# EAGLE board MCU board ATmega328p v3.0 (SN) RevB (EAGLE 9.2.1)
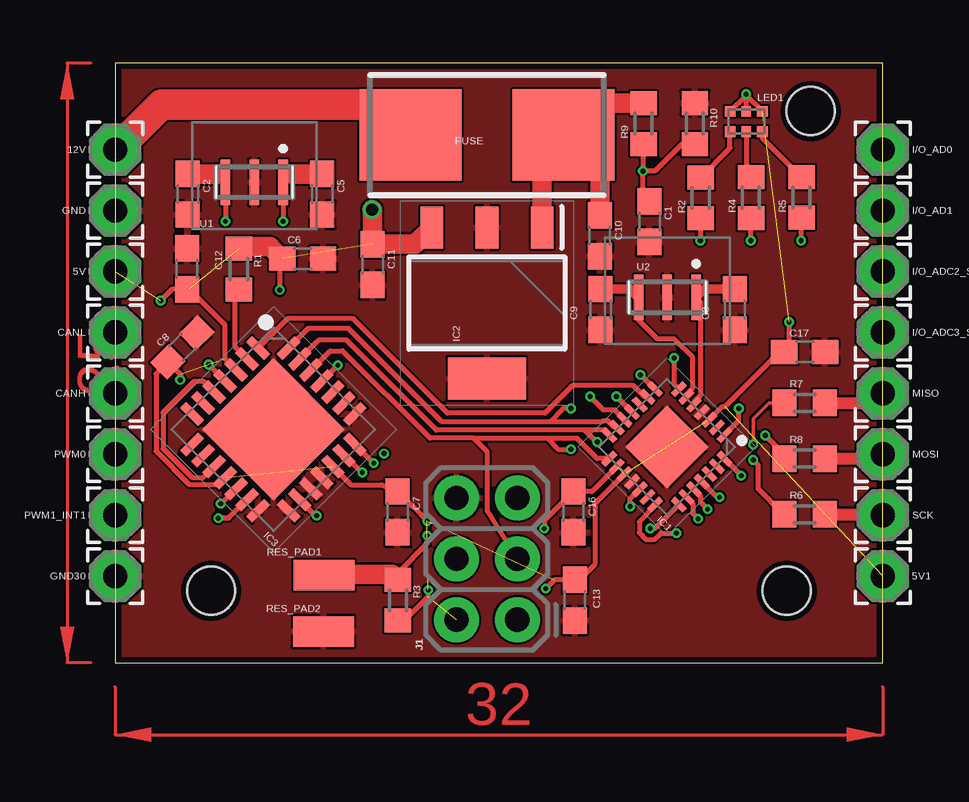
[diagram p0: board, top side]
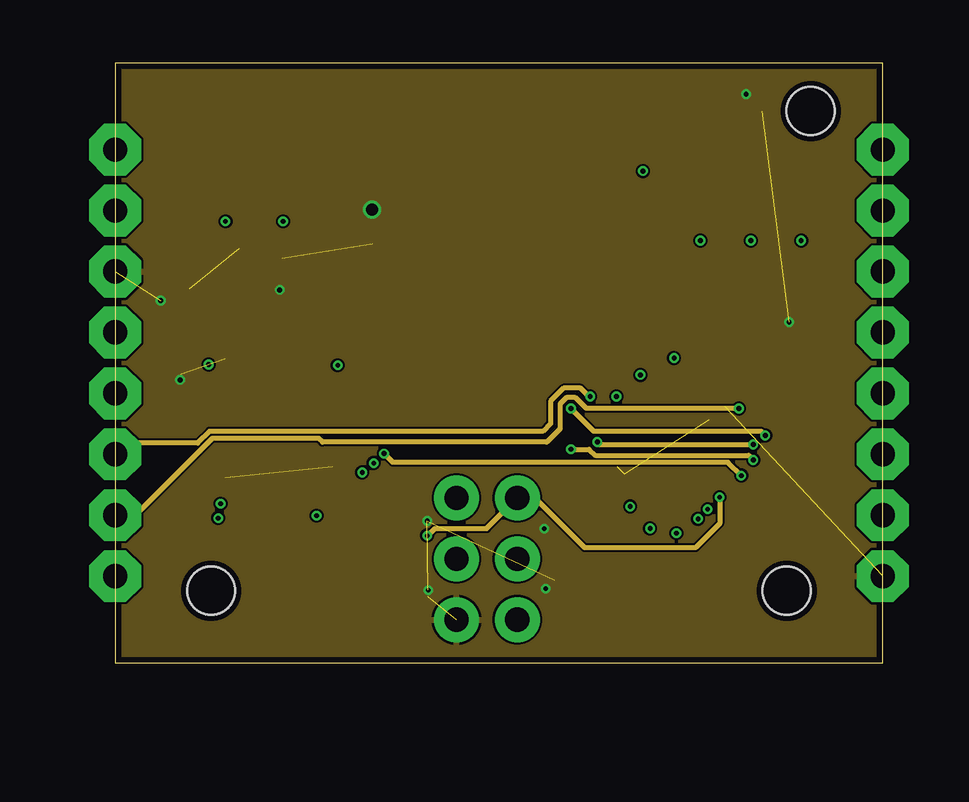
[diagram p1: board, inner layer Route2]
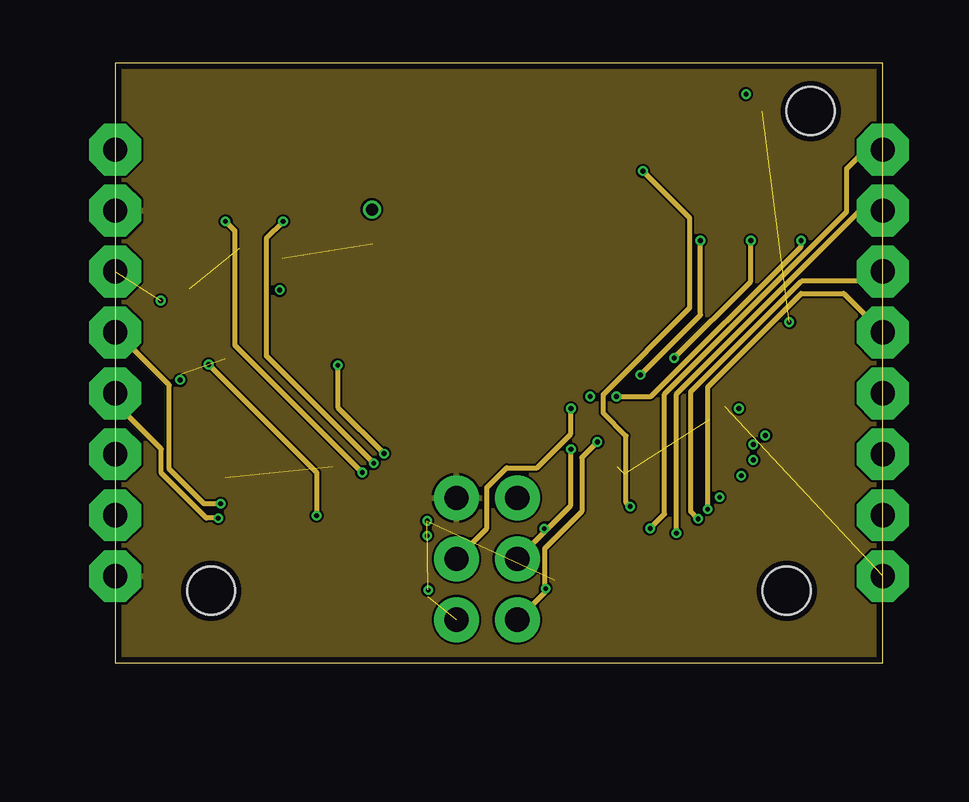
[diagram p2: board, inner layer Route15]

Size 32 x 25 mm. Coordinates in mm from the lower left corner, seen from the top.
Outline: 0,0 32,0 32,25 0,25 0,0
Copper layers (1*2*15*16): Top 0.035mm / dielectric 0.632mm / Route2 0.017mm / dielectric 0.632mm / Route15 0.017mm / dielectric 0.632mm / Bottom 0.035mm
Design rules "default *": minimum track width 3.5mil, minimum drill 0.2mm, track to track 3.5mil, track to pad 6mil, pad to pad 6mil, via to via 6mil, smd to smd 6mil, copper to edge 10mil, drill to drill 6mil, minimum pad ring 4mil, minimum via ring 4mil, stop-mask expansion 4mil, vias tented up to drill 25mil, thermal gap 4mil
Holes 2 mm at 28,3 4,3 29,23

## Footprints (pad centres in the part's own frame; a part is rotated, then mirrored left to right if it is on the bottom)
2,15/1,0 = drill 1.016 pad 2.159 octagon: 1 0,0
C0603 = smd 1.1 x 1: 1 -0.85,0; 2 0.85,0
0154001.DRT = smd 4.242 x 3.81: 1 -3.188,0; 2 3.188,0
QFN45P400X400X100-29N = smd 0.7 x 0.25: 1 -2.05,1.35; 2 -2.05,0.9; 3 -2.05,0.45; 4 -2.05,0; 5 -2.05,-0.45; 6 -2.05,-0.9; 7 -2.05,-1.35; 15 2.05,-1.35; 16 2.05,-0.9; 17 2.05,-0.45; 18 2.05,0; 19 2.05,0.45; 20 2.05,0.9; 21 2.05,1.35 | smd 0.25 x 0.7: 8 -1.35,-2.05; 9 -0.9,-2.05; 10 -0.45,-2.05; 11 0,-2.05; 12 0.45,-2.05; 13 0.9,-2.05; 14 1.35,-2.05; 22 1.35,2.05; 23 0.9,2.05; 24 0.45,2.05; 25 0,2.05; 26 -0.45,2.05; 27 -0.9,2.05; 28 -1.35,2.05 | smd 2.45 x 2.45: 29 0,0
SOT230P700X170-4N = smd 1.75 x 0.95: 1 -3.15,2.3; 2 -3.15,0; 3 -3.15,-2.3 | smd 1.75 x 3.25: 4 3.15,0
QFN65P600X600X100-29N = smd 1.05 x 0.35: 1 -2.85,1.95; 2 -2.85,1.3; 3 -2.85,0.65; 4 -2.85,0; 5 -2.85,-0.65; 6 -2.85,-1.3; 7 -2.85,-1.95; 15 2.85,-1.95; 16 2.85,-1.3; 17 2.85,-0.65; 18 2.85,0; 19 2.85,0.65; 20 2.85,1.3; 21 2.85,1.95 | smd 0.35 x 1.05: 8 -1.95,-2.85; 9 -1.3,-2.85; 10 -0.65,-2.85; 11 0,-2.85; 12 0.65,-2.85; 13 1.3,-2.85; 14 1.95,-2.85; 22 1.95,2.85; 23 1.3,2.85; 24 0.65,2.85; 25 0,2.85; 26 -0.65,2.85; 27 -1.3,2.85; 28 -1.95,2.85 | smd 4.2 x 4.2: 29 0,0
2X3-NS = drill 1.016 pad 1.88: 1 -2.54,-1.27; 2 -2.54,1.27; 3 0,-1.27; 4 0,1.27; 5 2.54,-1.27; 6 2.54,1.27
ROHM-1510-(0604) = smd 0.45 x 0.45: 1 -0.675,-0.425; 3 0.675,-0.425; 4 0.675,0.425; 6 -0.675,0.425 | smd 0.4 x 0.45: 2 0,-0.425; 5 0,0.425
R0603 = smd 1 x 1.1: 1 -0.85,0; 2 0.85,0
SMD1,27-2,54 = smd 1.27 x 2.54: 1 0,0
CSTNE16M0V530000R0 = smd 0.4 x 1.9: 1 -1.2,0.425; 2 0,0.425; 3 1.2,0.425

## Placement (x,y rotation side)
5V  5V_V5  [2,15/1,0]  0,16.31 0 top
5V1  5V_H0  [2,15/1,0]  32,3.61 0 top
12V  12V_V7  [2,15/1,0]  0,21.39 0 top
C1  0.1uF  [C0603]  22.27,18.39 270 top
C2  22pF  [C0603]  3.03,19.53 270 top
C3  22pF  [C0603]  25.83,14.73 270 top
C5  22pF  [C0603]  8.63,19.53 270 top
C6  0.1uF  [C0603]  7.82,16.84 0 top
C7  0.1uF  [C0603]  11.78,6.29 270 top
C8  0.1uF  [C0603]  2.8,13.15 45 top
C9  22pF  [C0603]  20.23,14.73 270 top
C10  10uF  [C0603]  20.2,17.8 270 top
C11  10uF  [C0603]  10.73,16.6 270 top
C12  0.1uF  [C0603]  3,16.42 90 top
C13  0.1uF  [C0603]  19.16,2.61 270 top
C16  0.1uF  [C0603]  19.1,6.29 270 top
C17  0.1uF  [C0603]  28.75,12.95 0 top
CANH  I/O_CANH_V3  [2,15/1,0]  0,11.23 0 top
CANL  I/O_CANH_V4  [2,15/1,0]  0,13.77 0 top
FUSE  0154005.DRT  [0154001.DRT]  15.5,22 0 top
GND  GND_V6  [2,15/1,0]  0,18.85 0 top
GND30  GND_V0  [2,15/1,0]  0,3.61 0 top
I/O_AD0  I/O_AD0_H7  [2,15/1,0]  32,21.39 0 top
I/O_AD1  I/O_AD1_H6  [2,15/1,0]  32,18.85 0 top
I/O_ADC2_SDA  I/O_ADC2_SDA_H5  [2,15/1,0]  32,16.31 0 top
I/O_ADC3_SCL  I/O_ADC3_SCL_H4  [2,15/1,0]  32,13.77 0 top
IC1  ATMEGA328P-MMH  [QFN45P400X400X100-29N]  23,9 225 top
IC2  MIC5239-5.0YS_TR  [SOT230P700X170-4N]  15.5,15 270 top
IC3  MCP25625-E_ML  [QFN65P600X600X100-29N]  6.6,9.73 315 top
J1  AVR_SPI_PROG_3X2NS  [2X3-NS]  15.5,4.33 90 top
LED1  SMLP36RGB2W3R  [ROHM-1510-(0604)]  26.31,22.56 0 top
MISO  MISO_H3  [2,15/1,0]  32,11.23 0 top
MOSI  MOSI__H2  [2,15/1,0]  32,8.69 0 top
PWM0  PWM0_V2  [2,15/1,0]  0,8.69 0 top
PWM1_INT1  PWM0_INT_V1  [2,15/1,0]  0,6.15 0 top
R1  10kOhm  [R0603]  5.16,16.41 270 top
R2  200Ohm  [R0603]  24.41,19.38 90 top
R3  10kOhm  [R0603]  11.79,2.61 270 top
R4  290Ohm  [R0603]  26.51,19.39 90 top
R5  190Ohm  [R0603]  28.61,19.4 90 top
R6  200Ohm  [R0603]  28.75,6.19 0 top
R7  200Ohm  [R0603]  28.75,10.84 0 top
R8  200Ohm  [R0603]  28.75,8.51 0 top
R9  3kOhm  [R0603]  22.03,22.48 90 top
R10  2kOhm  [R0603]  24.17,22.48 270 top
RES_PAD1  RES_PAD  [SMD1,27-2,54]  8.71,3.66 270 top
RES_PAD2  RES_PAD2  [SMD1,27-2,54]  8.69,1.3 270 top
SCK  SCK_H1  [2,15/1,0]  32,6.15 0 top
U1  CSTNE16M0V530000R0  [CSTNE16M0V530000R0]  5.8,20.46 180 top
U2  CSTNE16M0V530000R0  [CSTNE16M0V530000R0]  23.02,15.66 180 top

## Library data of the parts
5V 5V1 12V CANH CANL GND GND30 I/O_AD0 I/O_AD1 I/O_ADC2_SDA I/O_ADC3_SCL MISO MOSI PWM0 PWM1_INT1 RES_PAD1 RES_PAD2 SCK = wirepad
C1-C3 C5-C13 C16 C17 = eagle-ltspice; SPICEMODEL: NONE; SPICEPREFIX: C
FUSE = 0154005(Fuseholder)DRT; ALLIED_NUMBER: 70184875; ALLIED_PRICE-STOCK: https://www.alliedelec.com/littelfuse-0154005-drt/70184875/; ARROW_PART_NUMBER: 0154005.DRT; ARROW_PRICE-STOCK: https://www.arrow.com/en/products/0154005.drt/littelfuse; DESCRIPTION: Littelfuse 5A T Surface Mount Fuse, 125V ac/dc; HEIGHT: mm; MANUFACTURER_NAME: LITTELFUSE; MANUFACTURER_PART_NUMBER: 0154005.DRT; RS_PART_NUMBER: 2196260P; RS_PRICE-STOCK: http://uk.rs-online.com/web/p/products/2196260P
IC1 = ATMEGA328P-MMH; ARROW_PART_NUMBER: ATMEGA328P-MMH; ARROW_PRICE-STOCK: https://www.arrow.com/en/products/atmega328p-mmh/microchip-technology; DESCRIPTION: Atmel ATMEGA328P-MMH, 8bit AVR Microcontroller, 20MHz, 32 kB Flash, 28-Pin QFN; HEIGHT: 1mm; MANUFACTURER_NAME: Microchip; MANUFACTURER_PART_NUMBER: ATMEGA328P-MMH; RS_PART_NUMBER: 1310272P; RS_PRICE-STOCK: http://uk.rs-online.com/web/p/products/1310272P
IC2 = MIC5239-5.0YS_TR; ARROW_PART_NUMBER: MIC5239-5.0YS TR; ARROW_PRICE-STOCK: http://uk.rs-online.com/web/p/products/7275535P; DESCRIPTION: LDO Regulator Pos 5V 0.5A Micrel MIC5239-5.0YS TR, LDO Voltage Regulator, 500mA, 5 V 1%, 2.3 30 Vin, 3 + Tab-Pin SOT-223; HEIGHT: 1.7mm; MANUFACTURER_NAME: Micrel; MANUFACTURER_PART_NUMBER: MIC5239-5.0YS TR; RS_PART_NUMBER: 7275535P; RS_PRICE-STOCK: http://uk.rs-online.com/web/p/products/7275535P
IC3 = MCP25625-E_ML; ALLIED_NUMBER: 70431541; ALLIED_PRICE-STOCK: http://www.alliedelec.com/microchip-technology-inc-mcp25625-e-ml/70431541/; ARROW_PART_NUMBER: MCP25625-E/ML; ARROW_PRICE-STOCK: https://www.arrow.com/en/products/mcp25625-eml/microchip-technology; DESCRIPTION: CAN Controller with Transceiver QFN28 Microchip MCP25625-E/ML, CAN Controller, 28-Pin QFN; HEIGHT: 1mm; MANUFACTURER_NAME: Microchip; MANUFACTURER_PART_NUMBER: MCP25625-E/ML; RS_PART_NUMBER: 1654104; RS_PRICE-STOCK: http://uk.rs-online.com/web/p/products/1654104
J1 = SparkFun-Connectors
LED1 = SMLP36RGB2W3R; ARROW_PART_NUMBER: SMLP36RGB2W3R; ARROW_PRICE-STOCK: https://www.arrow.com/en/products/smlp36rgb2w3r/rohm-semiconductor; DESCRIPTION: LED,RGB,35/110/35mcd,top-looking,1510 ROHM SMLP36RGB2W3R, SML-P36 Series 3 RGB LED, 475 (Blue) nm, 535 (Green) nm, 629 (Red) nm 6-Pin Milky White; HEIGHT: mm; MANUFACTURER_NAME: ROHM Semiconductor; MANUFACTURER_PART_NUMBER: SMLP36RGB2W3R; RS_PART_NUMBER: 1246884P; RS_PRICE-STOCK: http://uk.rs-online.com/web/p/products/1246884P
R1-R10 = eagle-ltspice; SPICEMODEL: NONE; SPICEPREFIX: R
U1 U2 = CSTNE16M0V530000R0; ARROW_PART_NUMBER: CSTNE16M0V530000R0; ARROW_PRICE-STOCK: https://www.arrow.com/en/products/cstne16m0v530000r0/murata-manufacturing; DESCRIPTION: Resonators 16.0000MHz 15pF SMD CHP Resntr; HEIGHT: 1mm; MANUFACTURER_NAME: Murata Electronics; MANUFACTURER_PART_NUMBER: CSTNE16M0V530000R0

## Nets
5V: 5V1.1 5V.1 C6.1 C7.1 C8.1 C11.1 C12.1 C13.1 C16.1 C17.1 IC1.3 IC1.16 IC1.17 IC2.3 IC3.3 IC3.11 IC3.19 J1.2 LED1.4 LED1.5 LED1.6 R1.1 R3.2
12V_FUSED: C10.1 FUSE.2 IC2.1 R9.2
12V_UNFUSED: 12V.1 FUSE.1
BLUE_LED: IC1.11 R5.1
CAN_CS: IC1.9 IC3.1
CAN_INT: IC1.28 IC3.25
CAN_OSC1: C5.1 IC3.21 U1.1
CAN_OSC2: C2.1 IC3.20 U1.3
CANH: CANH.1 IC3.13
CANL: CANL.1 IC3.12
GND: C1.2 C2.2 C3.2 C5.2 C6.2 C7.2 C8.2 C9.2 C10.2 C11.2 C12.2 C13.2 C16.2 C17.2 GND30.1 GND.1 IC1.4 IC1.18 IC1.29 IC2.2 IC2.4 IC3.14 IC3.15 IC3.17 IC3.18 IC3.22 IC3.29 J1.6 R10.1 RES_PAD2.1 U1.2 U2.2
GREEN_LED: IC1.8 R2.1
I/O_ADC3: I/O_ADC3_SCL.1 IC1.24
I/O_D2_INT: IC1.1 PWM1_INT1.1
I/OAD0: I/O_AD0.1 IC1.22
I/OADC2: I/O_ADC2_SDA.1 IC1.23
MCU_OSC1: C3.1 IC1.5 U2.1
MCU_OSC2: C9.1 IC1.6 U2.3
MISO: IC1.14 IC3.27 J1.1 R7.1
MOSI: IC1.13 IC3.28 J1.4 R8.1
N$1: IC3.2 R1.2
N$2: IC1.12 PWM0.1
N$3: I/O_AD1.1 IC1.21
N$4: LED1.1 R2.2
N$8: LED1.2 R4.2
N$9: LED1.3 R5.2
N$10: R6.2 SCK.1
N$11: MISO.1 R7.2
N$12: MOSI.1 R8.2
RED_LED: IC1.7 R4.1
RESET_MCU: IC1.25 J1.5 R3.1 RES_PAD1.1
RXCAN: IC3.5 IC3.10
SCK: IC1.15 IC3.26 J1.3 R6.1
TXCAN: IC3.4 IC3.16
VOLTAGE_CHECK: C1.1 IC1.19 R9.1 R10.2

## Tracks (layer width: path | path; a pad name or v marks a point on that pad's centre or on a via)
5V  (via drill 0.2, 0.5)  (12 unrouted)
  Top 0.2: IC1.3 24.77,10.14 25.3,10.68 25.42,10.68 27.7,12.95 C17.1 28.1,13.15 v28.1,14.2 | C6.1 6.86,16.73 v6.86,15.54 | v2.71,11.79 2.73,11.81 2.73,12.02 C8.1 1.7,12.05 1.7,8.82 3.09,7.43 4.3,7.43 IC3.11 | v17.89,5.59 17.9,5.94 C16.1 19.87,7.14 IC1.16 | LED1.6 26.3,23.65 | 26.3,23.65 v26.3,23.7 | LED1.5 26.31,23.64 26.3,23.65 | LED1.4 26.32,23.65 26.3,23.65 | v1.9,15.1 2.37,15.57 C12.1 3.08,15.57 4.58,14.07 4.58,12.67 IC3.3 | IC3.19 9.83,7.42 11.12,7.42 C7.1 12.41,6.49 12.44,6.49 v13.01,5.91 | 11.8,1.78 R3.2 12.06,1.76 13.05,2.75 v13.05,3.03 | v17.95,3.09 18.32,3.46 C13.1 19.36,3.46 20,4.1 20,6.64 IC1.17
  Top 0.4: R1.1 5.17,17.35
  Top 0.813: IC2.3 12.5,17.45 C11.1 10.73,18.87 v10.7,18.9 | C6.1 6.46,17.35 5.17,17.35
  pour Route2: 0,25 0,0 32,0 32,25
12V_FUSED
  Top 0.2: 20.03,23.33 FUSE.2
  Top 0.5: 17.8,21.11 FUSE.2
  Top 0.813: IC2.1 17.8,21.11 | C10.1 20.2,20.49 FUSE.2 | R9.2 20.03,23.33
12V_UNFUSED
  Top 0.5: 12V.1 0.02,21.37 | 11.04,23.27 FUSE.1
  Top 1.27: 0.02,21.37 1.92,23.27 11.04,23.27
BLUE_LED  (via drill 0.2)
  Top 0.2: IC1.11 v20.9,11.1 | v20.9,11.1 | v28.6,17.6 v28.61,17.61 R5.1
  Route15 0.2: v20.9,11.1 22.34,11.1 28.6,17.36 v28.6,17.6
CAN_CS
  Top 0.2: 22.11,11.09 IC1.9 22.08,11.09 21.62,11.55 19.06,11.55 17.92,10.41 13.85,10.41 9.92,14.34 7.18,14.34 IC3.1
CAN_INT  (via drill 0.2)
  Top 0.2: v26.1,7.8 v26.1,7.81 IC1.28 | v9.28,12.4 IC3.25
  Route2 0.2: v26.1,7.8 25.55,8.35 11.58,8.35 v11.21,8.72
  Route15 0.2: v9.28,12.4 9.28,10.65 v11.21,8.72
CAN_OSC1  (via drill 0.2)
  Top 0.2: U1.1 v7,18.4 | 10.77,8.32 v10.78,8.32 10.01,9.09 IC3.21
  Top 0.4: 7.35,20.38 U1.1
  Top 0.813: C5.1 7.35,20.38
  Route15 0.2: v10.78,8.32 6.3,12.8 6.3,17.7 v7,18.4
CAN_OSC2  (via drill 0.2)
  Top 0.2: U1.3 v4.6,18.4 | 10.24,7.93 v10.3,7.93 9.6,8.63 IC3.20
  Top 0.4: 4.25,20.38 U1.3
  Top 0.813: C2.1 4.25,20.38
  Route15 0.2: v4.6,18.4 5,18 5,13.23 v10.3,7.93
CANH  (via drill 0.2)
  Top 0.2: 4.74,6.03 v4.3,6.03 4.74,6.03 | IC3.13 4.74,6.03
  Route15 0.2: v4.3,6.03 3.8,6.03 1.92,7.91 1.92,8.91 0,10.83 CANH.1
CANL  (via drill 0.2)
  Top 0.2: 4.42,6.63 v4.4,6.63 4.42,6.63 | 4.42,6.63 IC3.12
  Route15 0.2: v4.4,6.63 3.7,6.63 2.26,8.07 2.26,11.57 0.06,13.77 CANL.1
GND
  pour Top: 0,25 0,0 32,0 32,25
  pour Route15: 0,25 0,0 32,0 32,25
GREEN_LED  (via drill 0.2)
  Top 0.2: IC1.8 v21.91,12 v21.9,12 | v24.4,17.6 v24.41,17.61 R2.1
  Route15 0.2: v21.9,12 24.4,14.5 v24.4,17.6
I/O_ADC3  (via drill 0.2)
  Top 0.2: IC1.24 24.4,6.96 24.4,6.7 v24.7,6.4
  Route15 0.2: I/O_ADC3_SCL.1 30.37,15.4 28.6,15.4 24.7,11.49 v24.7,6.4
I/O_D2_INT  (via drill 0.2)
  Top 0.2: IC1.1 26,10.09 v26,10.6
  Route2 0.2: v26,10.6 19.64,10.6 19.19,11.05 18.81,11.05 18.55,10.79 18.55,9.75 18,9.2 8.64,9.2 8.49,9.35 4.05,9.35 0.9,6.2 0.05,6.2 PWM1_INT1.1
I/OAD0  (via drill 0.2)
  Top 0.2: v22.3,5.6 22.5,5.6 IC1.22
  Route15 0.2: v22.3,5.6 22.9,6.2 22.9,11.2 30.5,18.8 30.5,20.6 31.29,21.39 I/O_AD0.1
I/OADC2  (via drill 0.2)
  Top 0.2: IC1.23 24.08,6.64 24.08,6.22 v24.3,6
  Route15 0.2: v24.3,6 24,6.3 24,11.3 28.61,15.91 31.6,15.91 I/O_ADC2_SDA.1
MCU_OSC1
  Top 0.2: IC1.5 24.13,10.87 24.4,11.14 24.4,15.05 U2.1
  Top 0.4: C3.1 24.57,15.58 U2.1
MCU_OSC2
  Top 0.2: IC1.6 | 21.82,14.63 U2.3 | 21.82,14.48 U2.3 | IC1.6 | IC1.6 23.81,11.19 24.08,11.46 24.08,12.72 23.3,13.5 22.6,13.5 21.82,14.28 U2.3
  Top 0.4: C9.1 21.47,15.58 U2.3
MISO  (via drill 0.2)
  Top 0.152: v26.6,9.1 26.6,10.18 27.25,10.84 R7.1
  Top 0.2: IC3.27 | IC3.27 | R7.1 27.54,10.84 | IC1.14 20.39,9.7 19.56,9.7 | v20.1,9.2 20.06,9.2 19.56,9.7 | IC3.27 8.42,13.39 8.44,13.39 8.5,13.45 9.64,13.45 13.39,9.7 19.56,9.7
  Route2 0.2: v20.1,9.2 20.2,9.1 v26.6,9.1
  Route15 0.2: J1.1 17.91,2.93 17.91,4.76 19.45,6.3 19.45,8.55 v20.1,9.2
MOSI  (via drill 0.2)
  Top 0.2: v27.1,9.47 27.89,8.68 R8.1 | 18.12,10.04 13.63,10.04 9.73,13.94 8.05,13.94 IC3.28 | v19,10.6 18.68,10.6 18.12,10.04 | IC1.13 20.81,9.81 20.54,10.08 20.33,10.08 20.29,10.04 18.12,10.04
  Route2 0.2: v19,10.6 19.95,9.65 26.92,9.65 v27.1,9.47
  Route15 0.2: v19,10.6 19,9.54 17.59,8.13 16.32,8.13 15.5,7.31 15.5,5.6 J1.4
N$1
  Top 0.2: R1.2 5,15.4 5,13.16 IC3.2
N$2  (via drill 0.2)
  Top 0.2: IC1.12 20.82,10.55 20.35,10.55 v19.8,11.1
  Route2 0.2: v19.8,11.1 19.75,11.1 19.41,11.44 18.69,11.44 18.16,10.91 18.16,9.97 17.83,9.64 3.93,9.64 3.45,9.15 0.46,9.15 PWM0.1
N$3  (via drill 0.2)
  Top 0.2: IC1.21 22.5,6.55 21.85,5.89 21.85,5.41 22.11,5.15 22.49,5.15 22.74,5.4 v23.4,5.4
  Route15 0.2: v23.4,5.4 23.4,11.21 31.04,18.85 I/O_AD1.1
N$4
  Top 0.2: R2.2 25.64,21.45 LED1.1
N$8
  Top 0.2: LED1.2 26.31,20.44 R4.2
N$9
  Top 0.2: R5.2 26.98,21.88 LED1.3
N$10
  Top 0.5: R6.2 31.96,6.19 SCK.1
N$11
  Top 0.4: 31.61,10.84 MISO.1
  Top 0.5: R7.2 31.61,10.84
N$12
  Top 0.5: R8.2 31.82,8.51 MOSI.1
RED_LED  (via drill 0.2)
  Top 0.2: v23.3,12.7 23.3,11.6 IC1.7 | v26.5,17.6 v26.51,17.61 R4.1
  Route15 0.2: v23.3,12.7 26.5,15.9 v26.5,17.6
RESET_MCU  (via drill 0.2)
  Top 0.2: IC1.25 25.1,6.9 v25.2,6.9 | v13.01,5.3 13.01,4.97 11.79,3.75 R3.1
  Top 0.813: R3.1 11.57,3.68 8.73,3.68 RES_PAD1.1
  Route2 0.2: v25.2,6.9 25.2,5.8 24.2,4.8 19.57,4.8 17.5,6.87 J1.5 15.49,5.59 13.33,5.59 13.15,5.41 13.12,5.41 v13.01,5.3
RXCAN
  Top 0.2: 3.68,11.73 3.3,11.73 2,10.43 2,8.93 3.2,7.73 3.68,7.73 IC3.10 | IC3.5 3.68,11.73 | 3.68,11.73 | IC3.10
SCK  (via drill 0.2)
  Top 0.2: 14.94,9.36 15.52,8.78 15.52,6.33 J1.3 | v26.6,8.45 26.8,8.25 26.8,7.26 27.87,6.19 R6.1 | 14.94,9.36 18,9.36 | 18,9.36 19.24,9.36 20.09,8.51 IC1.15 | 18,9.36 18.46,8.9 v19,8.9 | 14.94,9.36 13.12,9.36 9.48,13 8.97,13 IC3.26
  Route2 0.2: v19,8.9 19.76,8.9 20.02,8.64 26.41,8.64 v26.6,8.45
  Route15 0.2: J1.3 19,6.56 v19,8.9
TXCAN  (via drill 0.2)
  Top 0.2: 8.36,6.13 v8.4,6.13 8.36,6.13 | 8.36,6.13 IC3.16 | IC3.4 v3.9,12.43 | v3.9,12.43
  Route15 0.2: v8.4,6.13 8.4,7.93 v3.9,12.43
VOLTAGE_CHECK  (via drill 0.2)
  Top 0.2: C1.1 22,19.51 v22,20.5 | R9.1 22,21.6 v22,20.5 | R10.2 23.63,21.63 22.5,20.5 v22,20.5 | IC1.19 21.47,6.83 v21.47,6.51
  Route15 0.2: v21.47,6.51 21.3,6.68 21.3,9.46 20.35,10.41 20.35,11.19 23.95,14.79 23.95,18.55 v22,20.5
(copper drawn outside any net)
  shapes: Top area x2